# Altium PCB Armadeus.PcbDoc (part 3 of 3)
Units mm, origin at the board's own origin, x right, y up, seen from the top; angles counter-clockwise.
Board outline 152.4 x 101.6 mm, 6 copper layers (Top Layer, MidLayer1, MidLayer2, MidLayer3, MidLayer4, Bottom Layer); 160 components, 306 nets, 1227 pads, 661 vias.
Unrouted connection lines stored in the file: 23.
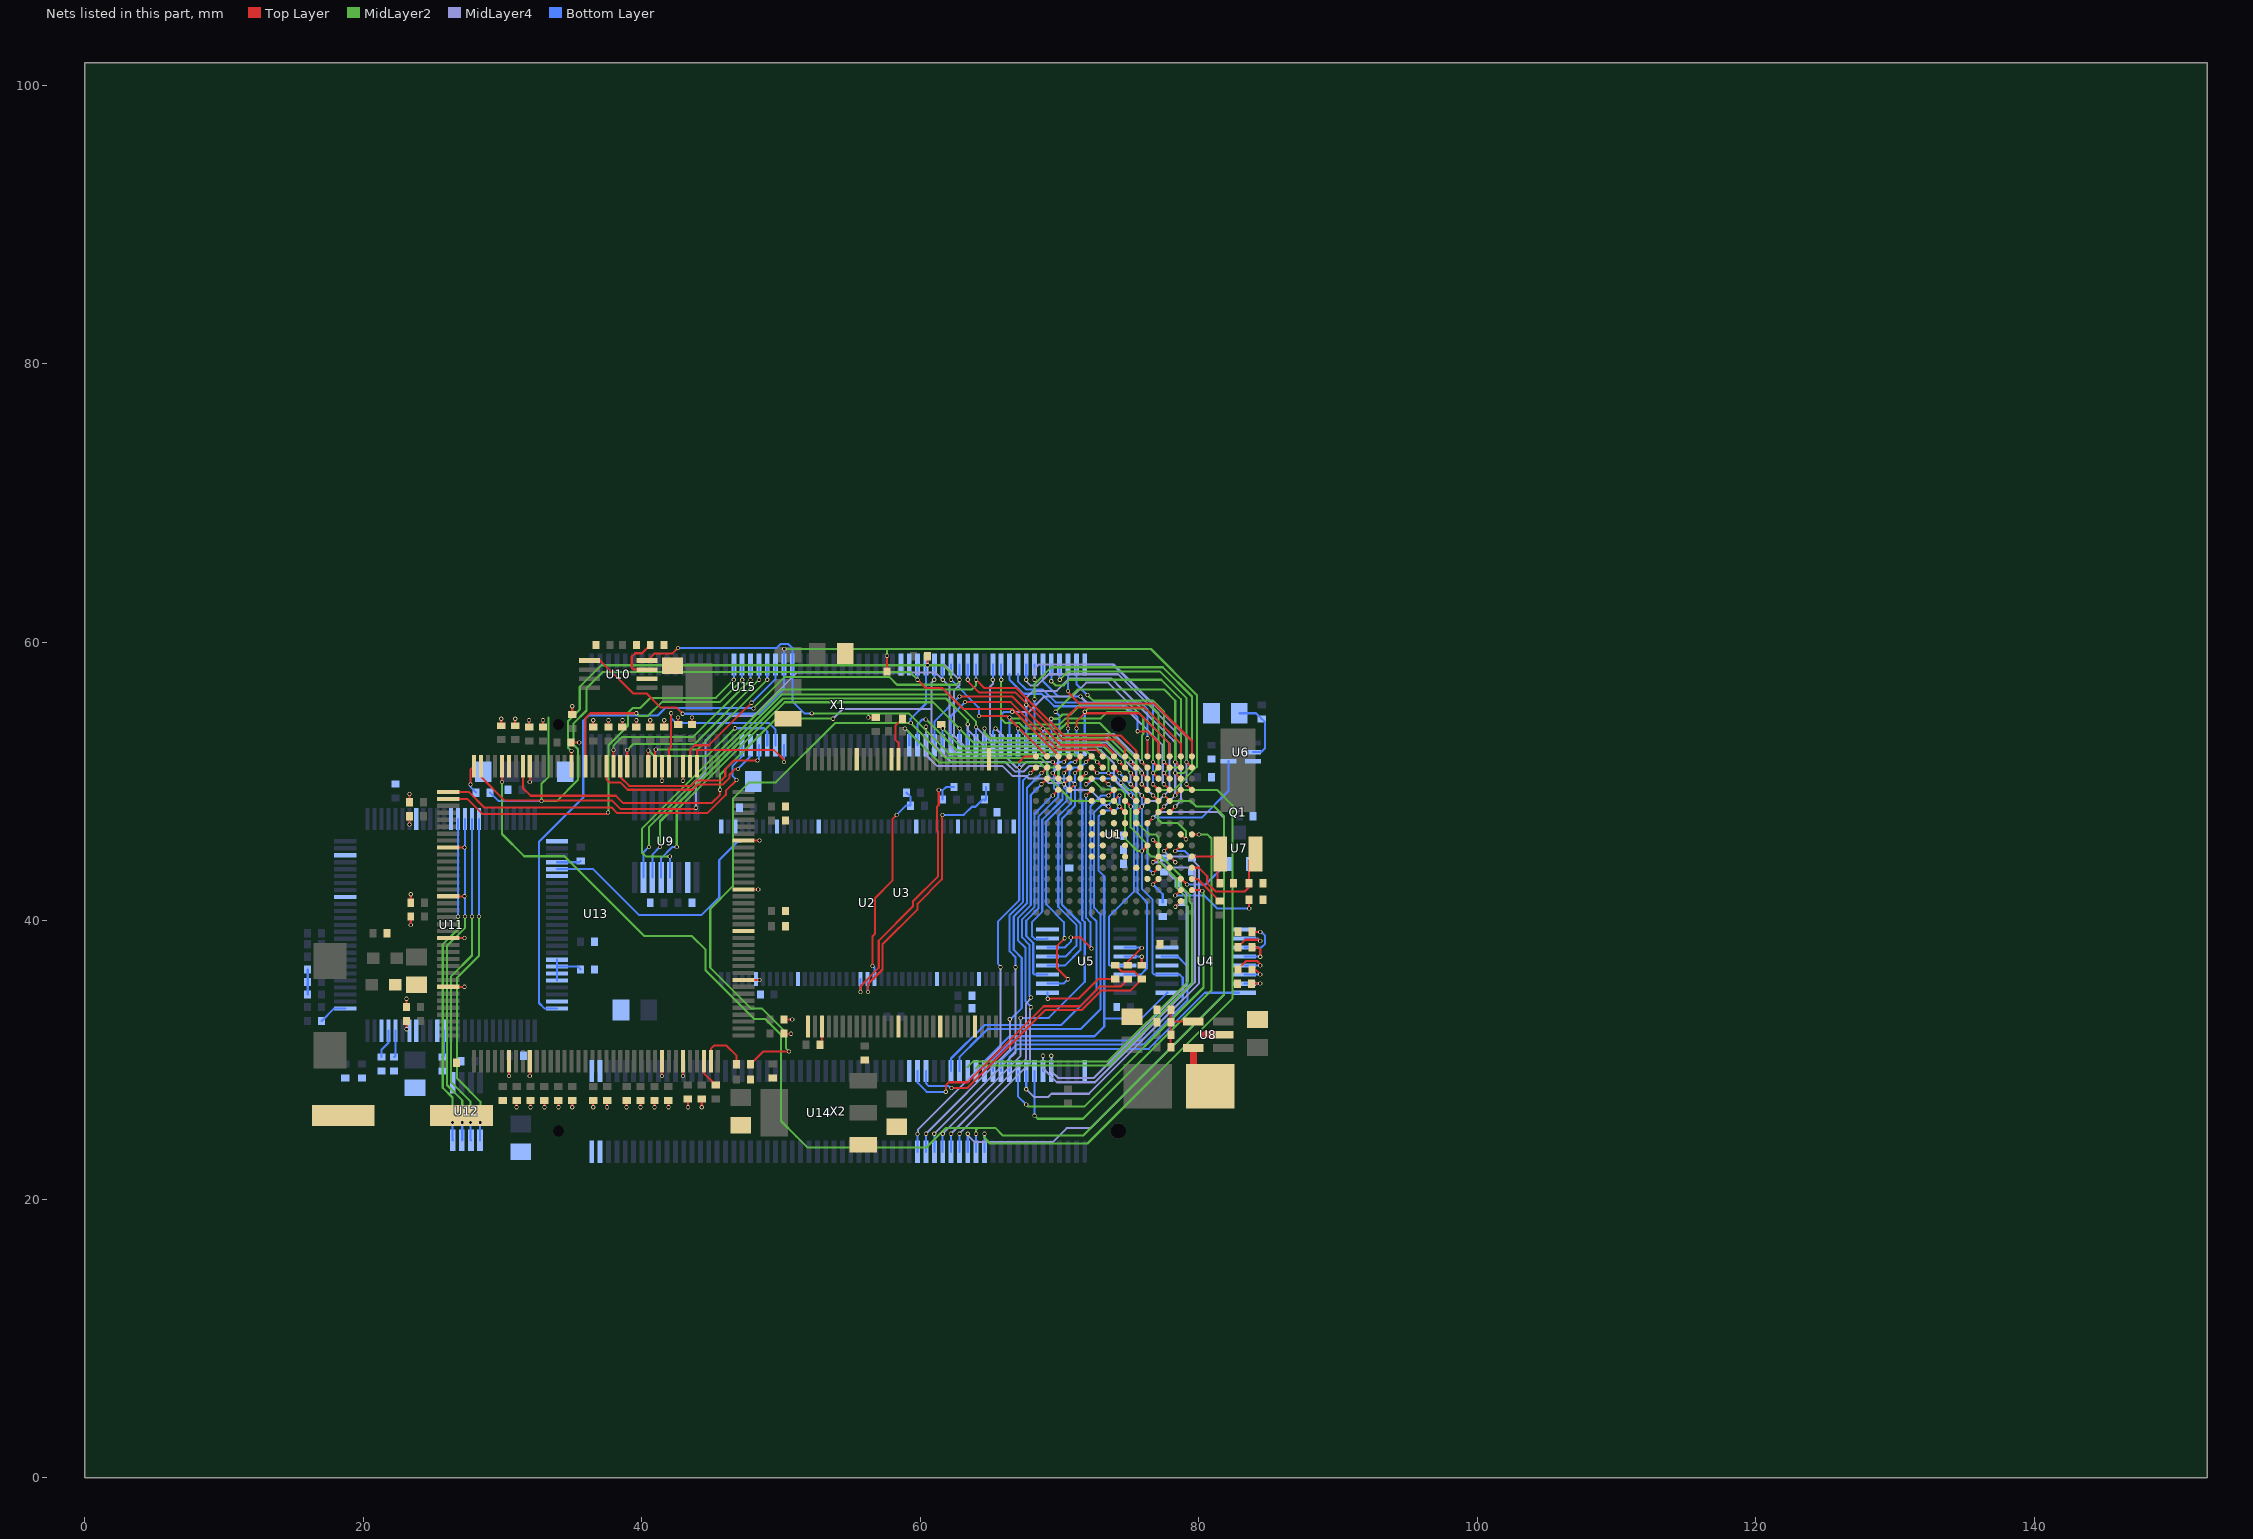
[diagram p7: the nets of this part, all layers, seen from the top]

## Via types
v1: diameter 0.3, hole 0.2, Top Layer to MidLayer2, 182 vias
v2: diameter 0.3, hole 0.2, Top Layer to Bottom Layer, 180 vias
v3: diameter 0.3, hole 0.2, MidLayer2 to Bottom Layer, 120 vias
v4: diameter 0.3, hole 0.2, MidLayer4 to Bottom Layer, 73 vias
v5: diameter 0.3, hole 0.2, Top Layer to MidLayer4, 49 vias
v6: diameter 0.3, hole 0.2, Top Layer to MidLayer3, 34 vias
v7: diameter 0.4, hole 0.2, Top Layer to MidLayer4, 15 vias
v8: diameter 0.3, hole 0.2, Top Layer to MidLayer1, 6 vias
v9: diameter 0.3, hole 0.2, MidLayer2 to MidLayer4, 2 vias

## Nets (pads, with @x,y where several pads share a name; then routed paths per layer and width w, separated by ;. In a path a pad name is that pad's centre, name@x,y a point inside that pad or via, vN(x,y) a via of type N, cw(c..) or ccw(c..) an arc to the next point about the centre after c; other vN are vias at no path point) (continued)
FPGA46: U13.74 X1.78 | length 29.4
  Top Layer w0.15: U13.74@26.1,48.75 27.457,48.75 28.536,47.671 37.461,47.671 v1(37.567,47.777)
  MidLayer2 w0.15: v1(37.567,47.777) 37.6,47.811 37.6,52.6 39,54 39,54.926 39.345,55.27 39.885,55.27 40.615,56 45.3,56 v3(46.6,57.3)
  Bottom Layer w0.15: v3(46.6,57.3) X1.78@46.6,58.4
FPGA47: U13.73 X1.42 | length 25.4
  Top Layer w0.15: U13.73@26.1,49.25 27.559,49.25 28.676,48.133 37.821,48.133 38.227,47.727 44.704,47.727 46.025,49.047 46.025,49.325 v2(46.8,50.1)
  Bottom Layer w0.15: v2(46.8,50.1) 46.5,50.4 46.5,51.1 47.2,51.8 X1.42@47.2,52.6
FPGA48: U13.56 X1.79 | length 17.1
  Top Layer w0.15: U13.56@35.95,51.1 35.95,54.55 36.3,54.9 v1(39.6,54.9)
  MidLayer2 w0.15: v1(39.6,54.9) 39.788,54.712 40.441,54.712 41.429,55.7 45.6,55.7 v3(47.2,57.3)
  Bottom Layer w0.15: v3(47.2,57.3) X1.79@47.2,58.4
FPGA49: U13.53 X1.41 | length 12.7
  Top Layer w0.15: U13.53@37.45,51.1 37.45,50.15 37.689,49.911 38.473,49.911 38.981,49.403 43.645,49.403 44.029,49.787 45.821,49.787 46.3,50.267 46.3,50.5 46.7,50.9 v2(46.9,50.9)
  Bottom Layer w0.15: v2(46.9,50.9) X1.41@47.8,51.8
FPGA50: U13.52 X1.80 | length 14.4
  Top Layer w0.15: U13.52@37.95,51.1 v1(37.95,52.25)
  MidLayer2 w0.15: v1(37.95,52.25) 37.95,52.561 38.589,53.2 39.5,53.2 ; v3(47.8,57.3) 43.7,53.2 39.5,53.2 ; 39.5,53.2 39.492,53.192 39.5,53.2
  Bottom Layer w0.15: v3(47.8,57.3) X1.80@47.8,58.4
FPGA51: U13.51 X1.40 | length 13.1
  Top Layer w0.15: U13.51@38.45,51.1 38.45,50.323 39.091,49.682 43.536,49.682 43.915,50.062 45.679,50.062 45.984,50.368 45.984,50.884 46.6,51.5 v2(48.3,51.5)
  Bottom Layer w0.15: v2(48.3,51.5) 48.4,51.6 X1.40@48.4,52.6
FPGA52: U13.50 X1.81 | length 13.8
  Top Layer w0.15: U13.50@38.95,51.1 v1(38.95,52.25)
  MidLayer2 w0.15: v1(38.95,52.25) 39.387,52.687 43.787,52.687 v3(48.4,57.3)
  Bottom Layer w0.15: v3(48.4,57.3) X1.81@48.4,58.4
FPGA53: U13.47 X1.39 | length 11.7
  Top Layer w0.15: U13.47@40.45,51.1 40.45,52.21 v1(40.462,52.222)
  MidLayer2 w0.15: v1(40.462,52.222) 40.488,52.222 40.869,51.841 44.704,51.841 v3(46.685,53.823)
  Bottom Layer w0.15: v3(46.685,53.823) 48.777,53.823 49,53.6 X1.39@49,52.6
FPGA54: U13.46 X1.82 | length 12.4
  Top Layer w0.15: U13.46@40.95,51.1 40.95,52.25 v1(41,52.3)
  MidLayer2 w0.15: v1(41,52.3) 44,52.3 v3(49,57.3)
  Bottom Layer w0.15: v3(49,57.3) X1.82@49,58.4
FPGA55: U13.44 X1.38 | length 13.2
  Top Layer w0.15: U13.44@41.95,51.1 41.95,52.35 42.1,52.5 v2(42.1,54.9)
  Bottom Layer w0.15: v2(42.1,54.9) 42.1,54.547 42.443,54.204 49.096,54.204 49.6,53.7 X1.38@49.6,52.6
FPGA56: U13.41 X1.83 | length 10.4
  Top Layer w0.15: U13.41@43.45,51.1 43.45,52.25 43.8,52.6 44.8,52.6 47.43,55.23 47.457,55.23 v2(47.879,55.651)
  Bottom Layer w0.15: v2(47.879,55.651) 49.6,57.372 X1.83@49.6,58.4
FPGA57: U13.40 X1.37 | length 9
  Top Layer w0.15: U13.40@43.95,51.1 43.95,52.25 49.5,52.25 50.2,51.55 v2(50.2,51.4)
  Bottom Layer w0.15: v2(50.2,51.4) X1.37@50.2,52.6
GND: C1.1 C2.1 C3.1 C4.1 C5.1 C6.1 C7.1 C8.1 C9.1 C10.1 C11.1 C12.1 C13.1 C14.1 C16.2 C18.2 C19.2 C20.2 C21.1 C22.2 C23.2 C24.1 C26.1 C27.1 C28.1 C29.1 C30.1 C31.1 C32.2 C33.2 C34.2 C35.2 C36.2 C37.2 C40.2 C42.1 C43.1 C44.1 C46.1 C47.1 C48.1 C49.1 C50.1 C51.1 C52.1 C53.1 C54.1 C55.1 C56.1 C57.1 C58.1 C59.1 C60.1 C61.1 C62.1 C63.1 C64.1 C65.1 C66.1 C67.1 C68.1 C69.1 C70.1 C71.1 C72.1 C73.1 C74.1 C75.1 C76.1 C77.1 C78.1 C79.1 C80.1 C81.1 C82.1 C83.1 C84.1 C85.1 C86.1 C87.1 C88.1 C89.1 C90.1 C91.1 C92.1 C93.1 C94.1 C95.1 L3.1 R2.1 R3.1 R4.1 R5.1 R29.1 R42.1 R43.1 R44.1 R45.2 R46.1 U1.E6 U1.G6 U1.G8 U1.G9 U1.G10 U1.H6 U1.H7 U1.H8 U1.H9 U1.J6 U1.J7 U1.J9 U1.K6 U1.K7 U1.K9 U1.L10 U1.L11 U1.L13 U1.M11 U2.6 U2.12 U2.32 U2.38 U2.44 U2.46 U2.52 U2.58 U2.72 U2.78 U2.84 U2.86 U3.2 U3.21 U3.29 U3.42 U3.48 U4.1 U4.12 U4.14 U5.8 U6.3 U7.1 U8.2 U9.10 U10.2 U11.15 U11.18 U11.19 U11.23 U11.42 U11.48 U11.58 U11.63 U11.76 U11.81 U11.99 U12.5 U13.9 U13.16 U13.22 U13.29 U13.42 U13.45 U13.64 U13.67 U13.81 U13.88 U13.94 U13.101 U13.114 U13.117 U13.136 U13.139 U14.1 U15.1 X1.98 X1.99 X2.59 X2.60 X2.61 X2.62 X2.99 | length 35.3
  Top Layer w0.15: v6(23.1,32.2) C81.1@23.1,32.801 ; C51.1@23.1,33.8 v6(23.1,34.4) ; v6(23.3,46.9) C83.1@23.3,47.5 ; C53.1@23.3,48.5 v6(23.3,49.1) ; v6(23.4,39.7) C82.1@23.4,40.301 ; C52.1@23.4,41.3 v6(23.4,41.9) ; U13.101@26.1,35.25 v6(27.25,35.25) ; U13.94@26.1,38.75 v6(27.25,38.75) ; U13.88@26.1,41.75 v6(27.25,41.75) ; U13.81@26.1,45.25 v6(27.25,45.25) ; C84.1@29.9,54 v6(29.9,54.5) ; v2(30.45,28.85) U13.114@30.45,29.9 ; C54.1@30.9,54 v6(30.9,54.5) ; v2(31,26.6) C80.1@31,27.1 ; C90.1@31.901,53.9 v6(31.9,54.4) ; v2(31.95,28.85) U13.117@31.95,29.9 ; v6(31.95,49.95) U13.64@31.95,51.1 ; v2(32,26.6) C59.1@32,27.1 ; C60.1@32.9,53.9 v6(32.9,54.4) ; v2@32.999,26.601 C89.1@32.999,27.1 ; v2(34,26.6) C63.1@34,27.1 ; C94.1@34.9,52.8 v6(35.5,52.8) ; v2@34.999,26.601 C93.1@34.999,27.1 ; C64.1@35,54.8 v6(35,55.4) ; v2(36.5,26.6) 36.501,26.601 C49.1@36.501,27.1 ; C85.1@36.5,53.9 v6(36.5,54.4) ; v2(37.5,26.6) C79.1@37.5,27.1 ; C55.1@37.6,53.9 v6(37.6,54.4) ; C95.1@38.6,53.9 v6(38.6,54.4) ; v2(38.9,26.6) C62.1@38.9,27.1 ; C65.1@39.6,53.9 v6(39.6,54.4) ; v2(39.9,26.6) C92.1@39.9,27.1 ; C91.1@40.6,53.9 v6(40.6,54.4) ; v2(40.9,26.6) C58.1@40.9,27.1 ; v6(41.45,28.85) U13.136@41.45,29.9 ; v6(41.45,50.05) U13.45@41.45,51.1 ; C61.1@41.6,53.9 v6(41.6,54.4) ; v2(41.9,26.6) C88.1@41.9,27.1 ; v6(42.6,54.6) v6(42.6,54.6) C86.1@42.601,54.1 ; v6(42.95,28.85) U13.139@42.95,29.9 ; v6(42.95,50.05) U13.42@42.95,51.1 ; v2(43.3,26.6) C48.1@43.3,27.2 ; C56.1@43.6,54.1 v6(43.6,54.6) ; v2(44.3,26.6) C78.1@44.3,27.2 ; U13.9@47.3,35.75 v6(48.45,35.75) ; U13.22@47.3,42.25 v6(48.35,42.25) ; U13.29@47.3,45.75 v6(48.45,45.75) ; C47.1@50.2,31.9 50.223,31.877 v6(50.698,31.877) ; C77.1@50.2,32.9 v6(50.8,32.9)
  Top Layer w0.5: 80.452,31.811 U8.2@81.745,31.811
  other v2: 33,26.6 35,26.6
I2C0: R6.1 U1.J11 U10.4 X1.85 | length 48.4
  Top Layer w0.15: U10.4@40.375,58.675 40.882,59.182 42.189,59.182 v2(42.596,59.588) ; v1(56.261,54.585) 56.276,54.6 R6.1@56.8,54.6 ; v1(75.895,45.009) 75.909,45.009 U1.J11@76.3,45.4
  MidLayer2 w0.15: v3(52.197,54.889) 59.157,54.889 62.096,51.95 71.138,51.95 71.476,51.613 71.476,50.444 71.704,50.216 72.263,50.216 73.05,49.428 74.398,49.428 74.701,49.125 74.701,45.898 75.59,45.009 v1(75.895,45.009) ; v1(56.261,54.585) 56.261,54.889
  Bottom Layer w0.15: v2(42.596,59.588) 49.682,59.588 49.962,59.868 50.521,59.868 50.8,59.588 50.8,55.753 51.664,54.889 v3(52.197,54.889)
I2C1: R7.1 U1.H14 U10.5 X1.84 | length 65.9
  Top Layer w0.15: U10.5@36.225,58.675 37.007,58.675 39.37,56.312 40.335,56.312 41.351,55.296 42.494,55.296 v2(42.926,54.864) ; R7.1@57.6,57.9 57.6,59.022 v1(57.607,59.03) ; U1.H14@78.7,46.2 79.053,45.847 v1(79.07,45.847)
  MidLayer2 w0.15: v3(50.216,59.512) 76.556,59.512 79.858,56.21 79.858,51.054 78.181,49.378 77.241,49.378 77.064,49.2 77.064,47.269 77.318,47.015 78.486,47.015 79.07,46.431 v1(79.07,45.847) ; v1(57.607,59.03) 57.607,59.487 57.633,59.512
  Bottom Layer w0.15: v2(42.926,54.864) 48.412,54.864 50.2,56.652 X1.84@50.2,58.4 50.216,58.416 v3(50.216,59.512)
JTAG0: U1.K12 X2.116 | length 25.8
  Top Layer w0.15: v5(76.7,44.2) U1.K12@77.1,44.6
  MidLayer4 w0.15: v4(69.4,30.3) 69.4,29.2 69.9,28.7 72.444,28.7 79.096,35.351 79.096,41.961 78.715,42.342 78.715,42.785 78.472,43.028 78.156,43.028 77.902,43.282 77.902,43.598 77.539,43.961 77.3,44.2 v5(76.7,44.2)
  Bottom Layer w0.15: X2.116@69.4,29.2 v4(69.4,30.3)
JTAG1: U1.J12 X2.115 | length 29.1
  Top Layer w0.15: v5(76.7,45.8) U1.J12@77.1,45.4
  MidLayer4 w0.15: v4(68.8,30.3) 68.8,29.4 69.8,28.4 72.533,28.4 79.7,35.567 79.7,43.5 79.385,43.815 78.08,43.815 77.1,44.795 77.1,45.4 v5(76.7,45.8)
  Bottom Layer w0.15: X2.115@68.8,29.2 v4(68.8,30.3)
JTAG2: U1.H15 X2.114 | length 32.2
  Top Layer w0.15: U1.H15@79.5,46.2 v1(80,46.2)
  MidLayer2 w0.15: v3(68.2,26) 68.425,25.775 71.675,25.775 80.9,35 80.9,45.9 80.6,46.2 v1(80,46.2)
  Bottom Layer w0.15: v3(68.2,26) X2.114@68.2,29.2
JTAG3: U1.J13 X2.113 | length 29.3
  Top Layer w0.15: v5(77.5,45) U1.J13@77.9,45.4
  MidLayer4 w0.15: v4(67.6,27.9) 68.17,27.33 69.164,27.33 69.409,27.575 72.097,27.575 80,35.478 80,43.9 79.3,44.6 77.9,44.6 v5(77.5,45)
  Bottom Layer w0.15: v4(67.6,27.9) X2.113@67.6,29.2
JTAG4: U1.N15 X2.112 | length 26.7
  Top Layer w0.15: U1.N15@79.5,42.2 80.177,42.2 v1(80.239,42.139)
  MidLayer2 w0.15: v3(67.6,26.8) 67.73,26.67 71.792,26.67 80.325,35.203 80.325,42.052 v1(80.239,42.139)
  Bottom Layer w0.15: X2.112@67,29.2 67,27.4 v3(67.6,26.8)
LCD0: U1.B12 X1.1 | length 11.5
  Top Layer w0.15: v1(76.7,51.4) U1.B12@77.1,51
  MidLayer2 w0.15: v3(71.8,55) 72.05,55.25 76.15,55.25 76.7,54.7 v1(76.7,51.4)
  Bottom Layer w0.15: X1.1@71.8,52.6 v3(71.8,55)
LCD1: U1.D12 X1.120 | length 12.4
  Top Layer w0.15: v2(76.7,49.8) U1.D12@77.1,49.4
  Bottom Layer w0.15: X1.120@71.8,58.4 73.8,58.4 76.7,55.5 v2(76.7,49.8)
LCD2: U1.A13 X1.2 | length 11.2
  Top Layer w0.15: v2(71.2,53.8) 71.2,54.3 71.8,54.9 75.7,54.9 77.9,52.7 U1.A13@77.9,51.8
  Bottom Layer w0.15: X1.2@71.2,51.9 71.2,53.5 v2(71.2,53.8)
LCD3: U1.B13 X1.119 | length 13
  Top Layer w0.15: v1(77.5,51.4) U1.B13@77.9,51
  MidLayer2 w0.15: v3(72,56.2) 72.4,55.8 76.7,55.8 77.5,55 v1(77.5,51.4)
  Bottom Layer w0.15: X1.119@71.2,58.4 71.2,57 v3(72,56.2) ; 71.5,56.7 71.7,56.5
LCD4: U1.A14 X1.3 | length 12.4
  Top Layer w0.15: v2(70.6,53.8) 70.6,54.7 71.2,55.3 76.1,55.3 78.7,52.7 U1.A14@78.7,51.8
  Bottom Layer w0.15: X1.3@70.6,52.6 70.6,53.3 v2(70.6,53.8)
LCD5: U1.A15 X1.118 | length 12.7
  Top Layer w0.15: v2(70.6,56.5) 70.6,56.4 71.4,55.6 76.8,55.6 79.5,52.9 U1.A15@79.5,51.8
  Bottom Layer w0.15: v2(70.6,56.5) X1.118@70.6,57.7
LCD6: U1.B14 X1.4 | length 17.1
  Top Layer w0.15: v1(78.3,51.4) U1.B14@78.7,51
  MidLayer2 w0.15: v3(69.7,55) 71.3,56.6 77.5,56.6 78.3,55.8 v1(78.3,51.4)
  Bottom Layer w0.15: v3(69.7,55) 70,54.7 X1.4@70,52.6
LCD7: U1.B15 X1.117 | length 16.4
  Top Layer w0.15: v1(79.1,51.4) U1.B15@79.5,51
  MidLayer2 w0.15: v3(70,57.3) 70.6,57.9 77.2,57.9 79.1,56 v1(79.1,51.4)
  Bottom Layer w0.15: v3(70,57.3) X1.117@70,58.4
LCD8: U1.C12 X1.5 | length 15.3
  Top Layer w0.15: v1(76.7,50.6) U1.C12@77.1,50.2
  MidLayer2 w0.15: v3(69.4,54.5) 69.893,54.5 70.2,54.807 70.782,54.807 71.5,55.525 76.475,55.525 77.1,54.9 77.1,51 v1(76.7,50.6)
  Bottom Layer w0.15: X1.5@69.4,52.6 v3(69.4,54.5)
LCD9: U1.C13 X1.116 | length 18.1
  Top Layer w0.15: v1(77.5,50.6) U1.C13@77.9,50.2
  MidLayer2 w0.15: v3(69.4,57.2) 69.7,56.9 70.3,56.9 70.7,57.3 77.3,57.3 78.7,55.9 78.7,51.2 78.5,51 77.9,51 v1(77.5,50.6)
  Bottom Layer w0.15: v3(69.4,57.2) 69.4,57.8 X1.116@69.4,58.4
LCD10: U1.E12 X1.6 | length 12.6
  Top Layer w0.15: v5(76.7,49) U1.E12@77.1,48.6
  MidLayer4 w0.15: v4(68.8,53.8) 69.2,53.4 73.9,53.4 76.3,51 76.3,49.4 v5(76.7,49)
  Bottom Layer w0.15: X1.6@68.8,52.6 v4(68.8,53.8)
LCD11: U1.D13 X1.115 | length 15.1
  Top Layer w0.15: v5(77.5,49.8) U1.D13@77.9,49.4
  MidLayer4 w0.15: v4(71.5,56.1) 72,55.6 74.4,55.6 77.4,52.6 77.4,49.9 v5(77.5,49.8)
  Bottom Layer w0.15: X1.115@68.8,58.4 68.8,57.2 69.9,56.1 v4(71.5,56.1)
LCD12: U1.C14 X1.7 | length 24
  Top Layer w0.15: v1(78.3,50.6) U1.C14@78.7,50.2
  MidLayer2 w0.15: v3(68.2,55.9) 68.2,57 69.4,58.2 77.4,58.2 79.5,56.1 79.5,51.2 78.9,50.6 v1(78.3,50.6)
  Bottom Layer w0.15: X1.7@68.2,52.6 v3(68.2,55.9)
LCD13: U1.D15 X1.114 | length 19
  Top Layer w0.15: v5(79.1,49.8) U1.D15@79.5,49.4
  MidLayer4 w0.15: v4(68.2,57.3) 68.2,58.1 68.5,58.4 73.889,58.4 76.489,55.8 76.5,55.8 79.1,53.2 v5(79.1,49.8)
  Bottom Layer w0.15: v4(68.2,57.3) X1.114@68.2,58.4
LCD14: U1.F12 X1.8 | length 22.1
  Top Layer w0.15: U1.F12@77.1,47.8 v5(77.5,48.2)
  MidLayer4 w0.15: v4(67.6,55.5) 67.6,56 68.1,56.5 69.8,56.5 70.7,57.4 73.7,57.4 74.5,56.6 75.858,55.242 77.9,53.2 78.3,52.8 78.3,49 v5(77.5,48.2)
  Bottom Layer w0.15: X1.8@67.6,52.6 v4(67.6,55.5)
LCD15: U1.F13 X1.113 | length 20.4
  Top Layer w0.15: U1.F13@77.9,47.8 v5(78.3,48.2)
  MidLayer4 w0.15: v4(67.6,57.3) 67.6,57.2 67.9,56.9 68.4,56.9 69.2,57.7 74.2,57.7 78.7,53.2 78.7,48.6 v5(78.3,48.2)
  Bottom Layer w0.15: v4(67.6,57.3) X1.113@67.6,58.4
LCD16: U1.B10 X1.9 | length 11
  Top Layer w0.15: v1(75.1,51.4) U1.B10@75.5,51
  MidLayer2 w0.15: v3(67,53.8) 67.384,53.416 73.284,53.416 75.1,51.6 v1(75.1,51.4)
  Bottom Layer w0.15: X1.9@67,52.6 v3(67,53.8)
LCD17: U1.A11 X1.112 | length 14
  Top Layer w0.15: U1.A11@76.3,51.8 v2(76.3,53.1)
  Bottom Layer w0.15: X1.112@67,57.7 67,57.2 67.6,56.6 68.789,56.6 69.714,55.675 75.825,55.675 75.997,55.503 76.3,55.2 v2(76.3,53.1)
LCD18: U1.B11 X1.10 | length 16.2
  Top Layer w0.15: v1(75.9,51.4) U1.B11@76.3,51
  MidLayer2 w0.15: v3(66.4,54.6) 66.468,54.532 67.2,54.532 67.657,54.075 69.975,54.075 70.432,54.532 72.957,54.532 73.4,54.975 75.625,54.975 76,54.6 76,53.4 75.9,53.3 v1(75.9,51.4)
  Bottom Layer w0.15: X1.10@66.4,52.6 v3(66.4,54.6)
LCD19: U1.A12 X1.111 | length 14.5
  Top Layer w0.15: v2(75.6,53.6) 76.3,53.6 77.1,52.8 U1.A12@77.1,51.8
  Bottom Layer w0.15: X1.111@66.4,57.7 66.4,57.3 67.4,56.3 68.7,56.3 69.6,55.4 74.8,55.4 75,55.2 75.6,54.6 v2(75.6,53.6)
LCD20: U1.F10 X1.11 | length 23.4
  Top Layer w0.15: U1.F10@75.5,47.8 v5(75.9,48.2)
  MidLayer4 w0.15: v4(66.6,55) 67.8,55 68.9,56.1 70.9,56.1 71.9,57.1 73.5,57.1 77.9,52.7 77.9,49.4 77.1,48.6 76.3,48.6 v5(75.9,48.2)
  Bottom Layer w0.15: X1.11@65.8,52.6 65.8,54.8 66,55 v4(66.6,55)
LCD21: U1.C11 X1.110 | length 16.9
  Top Layer w0.15: v1(75.9,50.6) U1.C11@76.3,50.2
  MidLayer2 w0.15: v3(65.8,57.3) 65.8,54.5 66.1,54.2 67.1,54.2 67.5,53.8 70.1,53.8 70.5,54.2 72.889,54.2 75.489,51.6 75.5,51.6 75.5,51 v1(75.9,50.6)
  Bottom Layer w0.15: v3(65.8,57.3) X1.110@65.8,58.4
LCD22: U1.D11 X1.12 | length 14.6
  Top Layer w0.15: v5(75.9,49.8) U1.D11@76.3,49.4
  MidLayer4 w0.15: v4(65.4,53.8) 66.1,53.1 73.6,53.1 75.9,50.8 v5(75.9,49.8)
  Bottom Layer w0.15: X1.12@65.2,52.6 65.2,53.6 v4(65.4,53.8)
LCD23: U1.E11 X1.109 | length 19.1
  Top Layer w0.15: v5(75.9,49) U1.E11@76.3,48.6
  MidLayer4 w0.15: v4(65.2,57.3) 65.2,57 65,56.8 65,53.4 65.6,52.8 73.4,52.8 75.5,50.7 75.5,49.4 v5(75.9,49)
  Bottom Layer w0.15: v4(65.2,57.3) X1.109@65.2,58.4
LCD24: U1.C10 X1.13 | length 14.1
  Top Layer w0.15: v1(75.1,50.6) U1.C10@75.5,50.2
  MidLayer2 w0.15: v3(64.6,53.8) 64.6,53.5 65,53.1 73.2,53.1 74.7,51.6 74.7,51 v1(75.1,50.6)
  Bottom Layer w0.15: X1.13@64.6,52.6 v3(64.6,53.8)
NetC7_2: C7.2 Q1.1 U1.K15 | length 4.1
  Top Layer w0.15: U1.K15@79.5,44.6 Q1.1@81.33,44.6 ; C7.2@81.5,42.7 81.33,42.87 Q1.1@81.33,44.6 ; Q1.1@81.53,44.8 Q1.1@81.33,44.6
NetC8_2: C8.2 Q1.2 U1.L15 | length 7.8
  Top Layer w0.15: U1.L15@79.5,43.8 80,43.8 80.6,43.2 80.6,42.7 81.2,42.1 83.299,42.1 83.6,42.401 83.6,42.8 83.6,44.33 Q1.2@84.07,44.8
NetC15_1: C15.1 U4.4 | length 2.3
  Top Layer w0.15: C15.1@83.775,38.075 84.251,38.075 84.404,37.922 v2(84.404,37.414)
  Bottom Layer w0.15: U4.4@83.275,37.425 84.393,37.425 v2(84.404,37.414)
NetC15_2: C15.2 U4.2 | length 3.1
  Top Layer w0.15: C15.2@82.775,38.075 83.333,38.633 84.303,38.633 v2(84.404,38.532)
  Bottom Layer w0.15: U4.2@83.275,38.725 84.211,38.725 v2(84.404,38.532)
NetC16_1: C16.1 U4.3 | length 3.2
  Top Layer w0.15: C16.1@83.8,39.2 84.396,39.2 v2(84.404,39.192)
  Bottom Layer w0.15: U4.3@83.275,38.075 84.481,38.075 84.76,38.354 84.76,38.913 84.48,39.192 v2(84.404,39.192)
NetC17_1: C17.1 U4.6 | length 1.9
  Top Layer w0.15: C17.1@83.8,36.5 84.048,36.5 v2(84.404,36.144)
  Bottom Layer w0.15: U4.6@83.275,36.125 84.385,36.125 v2(84.404,36.144)
NetC17_2: C17.2 U4.5 | length 3.2
  Top Layer w0.15: C17.2@82.8,36.5 83.409,37.109 84.176,37.109 84.404,36.881 v2(84.404,36.779)
  Bottom Layer w0.15: U4.5@83.275,36.775 84.4,36.775 v2(84.404,36.779)
NetC18_1: C18.1 U4.7 | length 1.7
  Top Layer w0.15: C18.1@83.8,35.5 83.816,35.484 v2(84.404,35.484)
  Bottom Layer w0.15: U4.7@83.275,35.475 84.395,35.475 v2(84.404,35.484)
NetC21_2: C21.2 R27.1 U6.2 | length 5
  Bottom Layer w0.15: C21.2@82.9,54.9 84.1,54.9 R27.1@84.5,54.5 84.76,54.24 84.76,52.4 84.459,52.1 U6.2@83.875,52.1
NetC25_1: C25.1 C27.2 R28.1 R29.2 U8.4 | length 4.4
  Top Layer w0.15: C27.2@77.97,33.611 77.97,32.691 R29.2@77.973,32.688 ; R28.1@77.973,30.888 77.973,31.808 77.97,31.811 77.97,32.685 78.046,32.761 U8.4@79.595,32.761
NetC41_2: C41.2 R34.1 R35.1 | length 1.8
  Bottom Layer w0.15: R35.1@16,34.7 C41.2@16,35.6 R34.1@16,36.5
NetC43_2: C43.2 Q2.1 U11.21 | length 1.9
  Bottom Layer w0.15: C43.2@22.2,30.2 22.3,30.3 U11.21@22.3,32.1
NetC44_2: C44.2 Q2.2 U11.22 | length 2.1
  Bottom Layer w0.15: C44.2@21.3,30.2 21.3,30.723 21.8,31.223 U11.22@21.8,32.1
NetL1_1: L1.1 U8.5 | length 3.3
  Top Layer w0.15: L1.1@79.595,29.336 L1.1@80.82,28.111 L1.1@80.82,28.161
  Top Layer w0.5: L1.1@79.595,29.336 U8.5@79.595,30.861
NetR2_2: R2.2 U1.K13 | length 1.5
  Top Layer w0.15: U1.K13@77.9,44.6 v2(78.3,44.2)
  Bottom Layer w0.15: R2.2@77.5,44.5 78,44.5 v2(78.3,44.2)
NetR3_2: R3.2 U1.J14 | length 2
  Top Layer w0.15: v2(78.3,45) U1.J14@78.7,45.4
  Bottom Layer w0.15: v2(78.3,45) 79,45 R3.2@79.5,44.5
NetR4_2: R4.2 U1.M12 | length 2.2
  Top Layer w0.15: v2(76.7,42.6) 76.871,42.771 U1.M12@77.1,43
  Bottom Layer w0.15: v2(76.7,42.6) 77.4,41.9 R4.2@77.4,41.3
NetR5_2: R5.2 U1.N14 | length 6.8
  Top Layer w0.15: v2(78.3,41.8) U1.N14@78.7,42.2 ; R5.2@83.6,41.4 83.6,40.886 v2(83.617,40.869)
  Bottom Layer w0.15: v2(78.3,41.8) 80.401,41.8 81.332,40.869 v2(83.617,40.869)
NetR8_1: R8.1 U1.P14 | length 1.2
  Top Layer w0.15: v2@78.3,41 78.302,41.002 U1.P14@78.7,41.4
  Bottom Layer w0.15: v2(78.308,40.996) 78.613,41.3 R8.1@78.8,41.3
NetR9_1: R9.1 U1.M15 | length 2.7
  Top Layer w0.15: U1.M15@79.5,43 79.9,43 R9.1@81.5,41.4
NetR10_2: R10.2 U3.31 | length 1.4
  Top Layer w0.15: R10.2@52.8,31.1 52.925,31.225 U3.31@52.925,32.4
NetR11_2: R11.2 R12.2 U2.23 | length 19.7
  Top Layer w0.15: v2(55.702,34.874) 55.702,35.306 57.006,36.61 57.006,38.566 59.461,41.021 59.461,41.377 61.269,43.184 61.269,46.376 61.2,46.445 61.2,48.205 61.316,48.32 v2(61.316,49.378) v2@61.269,49.331
  Bottom Layer w0.15: U2.23@55.7,35.8 55.7,34.876 v2(55.702,34.874) ; v2(61.316,49.378) 61.579,49.378 61.6,49.357 ; R12.2@61.6,48.7 61.6,49.357 ; R11.2@62.4,49.6 61.843,49.6 61.6,49.357
NetR13_2: R13.2 R14.2 U2.22 | length 20.3
  Top Layer w0.15: v2(56.236,34.874) 56.236,35.45 57.281,36.496 57.281,38.307 59.796,40.822 59.796,41.229 61.544,42.977 61.544,47.549 v2(61.595,47.6)
  Bottom Layer w0.15: U2.22@56.2,35.8 56.2,34.91 v2(56.236,34.874) ; v2(61.595,47.6) 63.119,47.6 63.703,48.184 63.957,48.184 64.473,48.7 R13.2@64.6,48.7 ; R13.2@64.65,48.65 64.7,48.7 R14.2@64.7,49.6
NetR15_2: R15.2 R16.2 U2.21 | length 15
  Top Layer w0.15: v2@56.566,36.678 56.566,38.887 56.735,39.056 56.735,41.622 57.988,42.875 57.988,47.295 v2(58.293,47.6)
  Bottom Layer w0.15: v2(56.566,36.754) 56.7,36.62 U2.21@56.7,35.8 ; v2(58.293,47.6) 58.953,48.26 R15.2@59.3,48.26 59.3,48.9 R16.2@59,49.2
NetR17_1: R17.1 U3.15 | length 3.2
  Top Layer w0.15: U3.15@58.425,51.6 58.425,52.775 58.2,53 58.2,54 R17.1@58.7,54.5
NetR19_1: R19.1 U3.53 | length 0
  Top Layer w0.15: U3.53@63.9,32.375 U3.53@63.925,32.4
NetR21_2: R21.2 U5.1 | length 5.9
  Top Layer w0.15: v2(69.139,34.392) 69.147,34.4 71.357,34.4 72.757,35.8 R21.2@74,35.8
  Bottom Layer w0.15: U5.1@69.125,34.825 69.125,34.405 v2(69.139,34.392)
NetR22_1: R22.1 U5.12 | length 1.8
  Top Layer w0.15: v2(75.895,37.414) 75.895,36.805 R22.1@75.9,36.8
  Bottom Layer w0.15: U5.12@74.675,37.425 75.884,37.425 v2(75.895,37.414)
NetR23_1: R23.1 U5.11 | length 2.9
  Top Layer w0.15: R23.1@74.9,36.8 74.9,37.054 v2(75.895,38.049)
  Bottom Layer w0.15: U5.11@74.675,38.075 75.869,38.075 v2(75.895,38.049)
NetR30_1: R30.1 U11.79 | length 1.7
  Bottom Layer w0.15: U11.79@33.9,44.2 35.5,44.2 R30.1@35.6,44.3
NetR31_1: R31.1 U11.67 U12.1 | length 24.4
  MidLayer2 w0.15: v3(28.296,40.31) 28.296,37.465 26.721,35.89 26.721,28.677 28.397,27 v3(28.397,25.502)
  Bottom Layer w0.15: v3(28.296,40.31) 28.3,40.314 U11.67@28.3,47.3 ; U12.1@28.375,24.225 28.375,25.479 v3(28.397,25.502)
NetR36_2: R36.2 U11.26 | length 2.1
  Bottom Layer w0.15: R36.2@17,32.8 17.9,33.7 U11.26@18.7,33.7
NetR38_2: R38.2 U13.142 | length 2.1
  Top Layer w0.15: U13.142@44.45,29.9 44.45,29.05 R38.2@45.3,28.2
NetR40_2: R40.2 U13.72 | length 2.3
  Top Layer w0.15: v2(27.686,49.784) 27.686,50.836 U13.72@28,51.15
  Bottom Layer w0.15: v2(27.686,49.784) 27.686,49.614 R40.2@28.1,49.2
NetR41_2: R41.2 U13.143 | length 3.7
  Top Layer w0.15: U13.143@44.95,29.9 44.95,30.802 45.187,31.039 46.05,31.039 46.8,30.289 R41.2@46.8,29.7
NetR44_2: R44.2 U10.3 | length 3.6
  Top Layer w0.15: U10.3@40.375,58.025 39.435,58.025 39.268,58.191 39.268,58.953 39.522,59.207 40.007,59.207 R44.2@40.6,59.8
NetR45_1: R45.1 U11.93 U11.94 U11.95 U11.96 | length 3.3
  Bottom Layer w0.15: U11.96@33.9,35.7 U11.93@33.9,37.2 ; U11.94@33.9,36.7 35.4,36.7 R45.1@35.6,36.5
NetR46_2: R46.2 U11.14 | length 1.9
  Bottom Layer w0.15: R46.2@25.7,30.2 25.8,30.3 U11.14@25.8,32.1
NetU11_64: U11.64 U12.4 | length 23.8
  MidLayer2 w0.15: v3(26.4,25.5) 26.4,27.3 25.7,28 25.7,38.3 26.8,39.4 v3(26.8,40.3)
  Bottom Layer w0.15: v3(26.4,25.5) 26.4,24.25 U12.4@26.425,24.225 ; v3(26.8,40.3) U11.64@26.8,47.3
NetU11_65: U11.65 U12.3 | length 24.1
  MidLayer2 w0.15: v3(27.1,25.5) 27.1,27.1 26,28.2 26,38.2 27.3,39.5 v3(27.3,40.3)
  Bottom Layer w0.15: U12.3@27.075,24.225 27.1,24.25 v3(27.1,25.5) ; v3(27.3,40.3) U11.65@27.3,47.3
NetU11_66: U11.66 U12.2 | length 24.3
  MidLayer2 w0.15: v3(27.7,25.5) 27.7,27 26.3,28.4 26.3,36 27.8,37.5 v3(27.8,40.3)
  Bottom Layer w0.15: v3(27.7,25.5) 27.7,24.25 U12.2@27.725,24.225 ; v3(27.8,40.3) U11.66@27.8,47.3
POR: U1.L12 U6.4 | length 13.2
  Top Layer w0.15: v2(76.7,43.4) U1.L12@77.1,43.8
  Bottom Layer w0.15: v2(76.7,43.4) 76.3,43.8 76.3,47 76.7,47.4 80.2,47.4 82.125,49.325 U6.4@82.125,51.45
RESETN: U1.M14 U3.16 U7.2 U11.80 X2.120 | length 22.4
  Top Layer w0.15: U1.M14@78.7,43 78.742,43 v2(79.146,42.596)
  Bottom Layer w0.15: U11.80@33.9,43.7 36.5,43.7 39.8,40.4 44.272,40.4 45.554,41.682 45.554,44.354 46.9,45.7 47.1,45.7 ; v2(79.146,42.596) 80.471,42.596 U7.2@81.95,44.075
SD0: U1.C2 X2.16 | length 30.2
  Top Layer w0.15: v2(68.7,49.8) U1.C2@69.1,50.2
  MidLayer4 w0.15: v4(62.8,24.7) 67.864,29.764 67.864,33.701 v4(67.945,33.782)
  Bottom Layer w0.15: X2.16@62.8,23.4 v4(62.8,24.7) ; v4(67.945,33.782) 67.945,33.833 67.55,34.228 67.55,38.05 67,38.6 67,40.189 67.925,41.114 67.925,49.025 v2(68.7,49.8)
SD1: U1.D3 X2.17 | length 29.7
  Top Layer w0.15: v2(69.5,49) U1.D3@69.9,49.4
  MidLayer4 w0.15: v4(62.2,24.7) 67.289,29.789 ; 67.285,29.794 67.589,30.099 67.589,34.061 67.945,34.417 v4(67.945,34.493)
  Bottom Layer w0.15: X2.17@62.2,23.4 v4(62.2,24.7) ; v4(67.945,34.493) 67.825,34.613 67.825,38.275 67.3,38.8 67.3,40.1 68.2,41 68.2,47.7 v2(69.5,49)
SD2: U1.C5 X2.18 | length 33.5
  Top Layer w0.15: U1.C5@71.5,50.2 v2(71.9,50.6)
  MidLayer4 w0.15: v4(61.6,24.7) 67.2,30.3 67.2,33.012 v4(67.208,33.02)
  Bottom Layer w0.15: X2.18@61.6,23.4 v4(61.6,24.7) ; v4(67.208,33.02) 69.209,33.02 ; 69.215,33.02 71.806,35.611 ; 71.8,35.611 71.8,39.889 71.625,40.064 71.625,48.535 71.5,48.66 71.5,50.2 v2(71.9,50.6)
SD3: U1.B1 X2.19 | length 31
  Top Layer w0.15: v2(67.9,50.6) U1.B1@68.3,51
  MidLayer4 w0.15: v4(61,24.7) 66.285,29.985 66.827,30.527 v4(66.827,36.652)
  Bottom Layer w0.15: X2.19@61,23.4 v4(61,24.7) ; v4(66.827,36.652) 66.827,37.384 66.411,37.8 66.4,37.8 66.4,40.389 67.375,41.364 67.375,50.075 v2(67.9,50.6)
SD4: U1.B2 X2.20 | length 31.7
  Top Layer w0.15: v2(68.7,50.6) U1.B2@69.1,51
  MidLayer4 w0.15: v4(60.4,24.7) 66.421,30.721 v4(66.421,32.918)
  Bottom Layer w0.15: X2.20@60.4,23.4 v4(60.4,24.7) ; v4(66.421,32.918) 66.472,32.918 67.275,33.722 67.275,37.325 66.7,37.9 66.7,40.3 67.65,41.25 67.65,49.55 v2(68.7,50.6)
SD5: U1.A1 X2.21 | length 32.6
  Top Layer w0.15: 67.1,51.4 67.5,51.8 U1.A1@68.3,51.8 U1.A1@68.3,51.9
  MidLayer4 w0.15: v4(59.792,24.689) 59.817,24.714 59.817,24.994 65.761,30.937 v4(65.761,36.652)
  Bottom Layer w0.15: v4(59.792,24.689) 59.792,23.408 X2.21@59.8,23.4 ; v4(65.761,36.652) 65.557,36.932 65.557,39.935 67.1,41.478 67.1,51.4
  other v2: 67.107,51.003
SPI0: U1.D10 U9.15 X1.14 | length 47.6
  Top Layer w0.15: v5(75.1,49.8) U1.D10@75.5,49.4
  MidLayer2 w0.15: v3(40.5,45.3) 40.5,46.715 50.021,56.236 62.064,56.236 64,54.3 v3(64,53.9)
  MidLayer4 w0.15: v3(64,53.9) 65.375,52.525 73.175,52.525 75.1,50.6 v5(75.1,49.8)
  Bottom Layer w0.15: U9.15@40.113,43.1 40.113,44.913 v3(40.5,45.3) ; X1.14@64,52.6 v3(64,53.9)
SPI1: U1.E10 U9.14 X1.15 | length 47.7
  Top Layer w0.15: v5(75.1,49) U1.E10@75.5,48.6
  MidLayer2 w0.15: v3(41.3,45.3) 41.3,47.126 50.134,55.961 61.839,55.961 63.216,54.584 63.4,54.4 v3(63.4,54.1)
  MidLayer4 w0.15: v3(63.4,54.1) 63.4,53.7 64.85,52.25 72.95,52.25 73.9,51.3 73.9,50.2 v5(75.1,49)
  Bottom Layer w0.15: U9.14@40.748,43.1 40.748,44.748 v3(41.3,45.3) ; X1.15@63.4,52.6 v3(63.4,54.1)
SPI2: U1.B9 U9.13 X1.16 | length 44
  Top Layer w0.15: v1(74.3,51.4) U1.B9@74.7,51
  MidLayer2 w0.15: v3(42.5,45.3) 42.5,47.937 50.248,55.686 60.914,55.686 63.8,52.8 72.9,52.8 v1(74.3,51.4)
  Bottom Layer w0.15: U9.13@41.383,43.1 41.383,44.483 42.2,45.3 v3(42.5,45.3) ; X1.16@62.8,52.6 v3(62.8,53.8)
SPI3: U1.A10 U9.12 X1.107 | length 49.1
  Top Layer w0.15: v2(64,57.3) 64.6,56.7 66.9,56.7 70.3,53.3 74.4,53.3 75.5,52.2 U1.A10@75.5,51.8
  MidLayer2 w0.15: v3(42,44.6) 40.3,44.6 40,44.9 40,46.604 49.996,56.6 63.7,56.6 64,56.9 v2(64,57.3)
  Bottom Layer w0.15: U9.12@42.018,43.1 v3@42.018,44.582 ; v2(64,57.3) X1.107@64,58.4
SPI4: U1.A9 X1.106 | length 15
  Top Layer w0.15: v2(63.4,57.3) 63.4,57.2 64.2,56.4 66.8,56.4 70.175,53.025 73.975,53.025 74.7,52.3 U1.A9@74.7,51.8
  Bottom Layer w0.15: v2(63.4,57.3) X1.106@63.4,58.4
SSI_A0: U1.A7 X1.17 | length 15
  Top Layer w0.15: v2(63.2,55.7) 66.489,55.7 69.889,52.3 72.6,52.3 U1.A7@73.1,51.8
  Bottom Layer w0.15: X1.17@62.2,52.6 62.2,54.7 v2(63.2,55.7)
SSI_A1: U1.C8 X1.18 | length 15.6
  Top Layer w0.15: v1(73.5,50.6) U1.C8@73.9,50.2
  MidLayer2 w0.15: v3(61.6,53.8) 62.9,52.5 72.6,52.5 73.5,51.6 v1(73.5,50.6)
  Bottom Layer w0.15: X1.18@61.6,52.6 v3(61.6,53.8)
SSI_A2: U1.A8 X1.19 | length 17.2
  Top Layer w0.15: v2(62.8,56.1) 66.6,56.1 70.1,52.6 73.3,52.6 73.9,52 U1.A8@73.9,51.8
  Bottom Layer w0.15: X1.19@61,52.6 61,54.3 v2(62.8,56.1)
SSI_A3: U1.F8 X1.20 | length 18.5
  Top Layer w0.15: v5(73.5,48.2) U1.F8@73.9,47.8
  MidLayer4 w0.15: v4(60.401,53.924) 60.401,51.899 61.2,51.1 65.9,51.1 66.6,50.4 67.6,50.4 67.8,50.2 68.9,50.2 69.2,49.9 70.2,49.9 70.7,49.4 72.2,49.4 73.4,48.2 v5(73.5,48.2)
  Bottom Layer w0.15: X1.20@60.4,52.6 v4(60.401,53.924) v4(60.401,53.924)
SSI_A4: U1.B7 X1.21 | length 16.4
  Top Layer w0.15: v1(72.7,51.4) U1.B7@73.1,51
  MidLayer2 w0.15: v3(60.376,54.458) 60.401,54.458 62.634,52.225 71.875,52.225 v1(72.7,51.4)
  Bottom Layer w0.15: X1.21@59.8,52.6 59.8,54.11 60.147,54.458 v3(60.376,54.458)
SSI_A5: U1.F9 X1.22 | length 19.9
  Top Layer w0.15: v1(74.3,48.2) U1.F9@74.7,47.8
  MidLayer2 w0.15: v3(58.9,53.8) 61.341,51.359 68.555,51.359 69.139,50.775 69.139,50.343 70.882,48.6 73.9,48.6 v1(74.3,48.2)
  Bottom Layer w0.15: v3(58.9,53.8) 59.2,53.5 X1.22@59.2,52.6
SSI_B0: U1.C3 U11.100 X1.105 | length 68.6
  Top Layer w0.15: v5(69.5,50.6) U1.C3@69.9,50.2
  MidLayer2 w0.15: v3(48.006,55.245) 50.267,57.506 57.76,57.506 58.318,56.947 62.577,56.947 62.8,57.17 v2(62.8,57.3)
  MidLayer4 w0.15: 61.7,58.4 v2(62.8,57.3) 62.8,56.9 62.4,56.5 62.4,53.3 63.725,51.975 69.525,51.975 69.9,51.6 69.9,51 v5(69.5,50.6)
  Bottom Layer w0.15: U11.100@33.9,33.7 33,33.7 32.614,34.086 32.614,45.669 35.789,48.844 35.789,54.356 36.17,54.737 41.148,54.737 41.681,55.27 47.981,55.27 v3(48.006,55.245) ; v2(62.8,57.3) 62.8,57.7 X1.105@62.8,58.4
SSI_B1: R37.1 U1.A2 U13.58 X1.104 | length 45.4
  Top Layer w0.15: U13.58@34.95,51.1 v1(34.95,52.197) ; R37.1@60.5,59 60.5,58.347 v1(60.503,58.344) ; v2(64.2,54.7) 66.2,54.7 U1.A2@69.1,51.8
  MidLayer2 w0.15: v1@34.925,52.197 34.696,52.426 34.696,54.331 35.535,55.169 35.535,56.794 37.084,58.344 61.646,58.344 62.205,57.785 v3(62.205,57.302)
  Bottom Layer w0.15: X1.104@62.2,58.4 62.2,57.307 v3(62.205,57.302) ; v3@62.201,57.299 64.2,55.3 v2(64.2,54.7)
SSI_B2: R39.1 U1.B3 U13.71 X1.103 | length 55.9
  Top Layer w0.15: U13.71@28.45,50.315 30.126,48.64 37.847,48.64 38.456,48.031 43.815,48.031 v5(43.891,48.108) ; v5(69.5,51.4) U1.B3@69.9,51
  MidLayer4 w0.15: v5(43.891,48.108) 43.891,49.936 44.577,50.622 44.577,52.959 46.33,54.712 48.031,54.712 51.156,57.836 61.064,57.836 62.1,56.8 62.1,52.5 62.625,51.975 ; 62.488,52.112 62.9,51.7 66.2,51.7 66.9,51 67.2,51 67.6,51.4 v5(69.5,51.4)
  Bottom Layer w0.15: X1.103@61.595,58.405 X1.103@61.6,58.4 v4(61.6,57.3)
SSI_B3: U1.D4 U13.65 X1.102 | length 53.3
  Top Layer w0.15: U13.65@31.45,51.1 31.45,49.525 32.004,48.971 38.125,48.971 38.633,48.463 45.034,48.463 45.618,49.047 v1(45.618,49.403) ; U1.D4@70.7,49.4 v5(71.1,49.8)
  MidLayer2 w0.15: v1(45.618,49.403) 45.618,50.495 49.632,54.508 v9(53.721,54.508)
  MidLayer4 w0.15: v9(53.721,54.508) 54.407,55.194 60.8,55.194 ; v4(61,57.3) 60.8,57.1 60.8,52.8 62.2,51.4 66.1,51.4 66.8,50.7 67.4,50.7 67.8,51.1 68.8,51.1 69.1,50.8 69.1,50.5 69.4,50.2 70.7,50.2 v5(71.1,49.8)
  Bottom Layer w0.15: v4(61,57.3) X1.102@61,58.4
SSI_B4: R41.1 U1.C4 X1.101 | length 58.2
  Top Layer w0.15: R41.1@47.8,29.7 48.707,30.607 v1(50.571,30.607) ; v1(70.3,49.8) U1.C4@70.7,50.2
  MidLayer2 w0.15: v1(50.571,30.607) 50.343,30.836 50.343,31.979 48.616,33.706 47.828,33.706 44.907,36.627 44.907,40.843 46.533,42.469 46.533,48.768 47.697,49.932 49.619,49.932 53.887,54.2 v3(59.3,54.2) 61.825,51.675 68.67,51.675 69.342,51.003 69.774,51.003 69.901,50.876 69.901,50.199 v1(70.3,49.8)
  Bottom Layer w0.15: v3(59.3,54.2) 59.3,54.5 60.4,55.6 X1.101@60.4,58.4
SSI_B5: R40.1 U1.A3 X1.100 | length 58.5
  Top Layer w0.15: v2(59.8,57.3) 60.4,56.7 61.589,56.7 63.089,55.2 66.6,55.2 69.9,51.9 U1.A3@69.9,51.8
  MidLayer2 w0.15: 33.299,54.585 33.299,50.343 32.791,49.835 v3(32.791,48.59) 33.884,48.59 35.408,50.114 35.408,52.324 35.077,52.654 35.077,54.153 36.017,55.093 36.017,56.693 37.186,57.861 59.239,57.861 v2(59.8,57.3)
  Bottom Layer w0.15: R40.1@29.1,49.2 29.71,48.59 v3(32.791,48.59) ; v2(59.8,57.3) 59.8,57.9 X1.100@59.8,58.4
TIM0: U1.D14 X2.13 | length 43.1
  Top Layer w0.15: v1(78.3,49) U1.D14@78.7,49.4
  MidLayer2 w0.15: v3(64.6,24.7) 64.6,24.4 65,24 72,24 82.4,34.4 82.4,48.3 81.3,49.4 78.7,49.4 v1(78.3,49)
  Bottom Layer w0.15: X2.13@64.6,23.4 v3(64.6,24.7)
TIM1: U1.E13 U13.68 X2.14 | length 95.6
  Top Layer w0.15: v1(29.95,49.95) U13.68@29.95,51.1 ; v1(77.5,49) U1.E13@77.9,48.6
  MidLayer2 w0.15: v1(29.95,49.95) 29.95,46.225 31.547,44.628 34.442,44.628 40.17,38.9 43.586,38.9 44.577,37.909 44.577,36.424 48.061,32.939 48.849,32.939 49.987,31.801 49.987,25.613 51.079,24.521 51.9,23.7 60.4,23.7 61.8,25.1 65.4,25.1 65.925,24.575 71.686,24.575 81.8,34.689 81.8,47.5 81.1,48.2 79.8,48.2 79.4,48.6 77.9,48.6 v1(77.5,49) ; v3(64,24.7) 64,25 64.1,25.1
  Bottom Layer w0.15: X2.14@64,23.4 v3(64,24.7)
TIM2: U1.G11 X2.15 | length 43.1
  Top Layer w0.15: U1.G11@76.3,47 v5(76.7,47.4)
  MidLayer4 w0.15: v4(63.4,24.7) 63.4,24.6 63.9,24.1 69.5,24.1 70.5,25.1 72.211,25.1 81.8,34.689 81.8,47.4 81.4,47.8 77.1,47.8 v5(76.7,47.4)
  Bottom Layer w0.15: X2.15@63.4,23.4 v4(63.4,24.7)
UART0: U1.E8 U4.9 X2.108 | length 34.1
  Top Layer w0.15: U1.E8@73.9,48.6 v2(74.3,49)
  Bottom Layer w0.15: X2.108@64.6,29.2 64.6,29.9 66.4,31.7 72.5,31.7 73.2,32.4 73.2,43.2 72.8,43.6 72.8,47.5 73.2,47.9 74,47.9 74.3,48.2 v2(74.3,49) ; 73.2,32.969 75.869,32.969 U4.9@77.725,34.825
UART1: U1.B8 U4.11 X2.109 | length 36
  Top Layer w0.15: U1.B8@73.9,51 v2(74.3,50.6)
  Bottom Layer w0.15: X2.109@65.2,29.2 65.2,30 66.6,31.4 75.9,31.4 78.842,34.342 78.842,35.916 78.632,36.125 76.803,36.125 76.657,36.271 76.657,41.529 75.9,42.286 75.9,49 v2(74.3,50.6)
UART2: U1.C9 X2.107 | length 35.5
  Top Layer w0.15: v1(74.4,49.9) U1.C9@74.7,50.2
  MidLayer2 w0.15: 64,29.4 64.2,29.6 73.555,29.6 79.5,35.545 79.5,41.201 79.329,41.372 79.329,41.855 78.689,42.494 78.689,43.211 77.1,44.8 77.1,46 76.9,46.2 76.4,46.2 75.5,47.1 75.5,49.3 75.4,49.4 74.9,49.4 v1(74.4,49.9)
UART3: U1.E9 X2.106 | length 33.3
  Top Layer w0.15: U1.E9@74.7,48.6 v1(75.1,48.2)
  MidLayer2 w0.15: 63.4,29.5 63.8,29.9 73.467,29.9 79.225,35.658 79.225,40.993 79.045,41.173 79.045,41.732 78.41,42.367 78.41,42.99 76.8,44.6 76.6,44.6 76.3,44.9 76.3,45.5 75.1,46.7 v1(75.1,48.2)
UART4: U1.C7 X2.105 | length 30.4
  Top Layer w0.15: U1.C7@73.1,50.2 v2(73.5,49.8)
  Bottom Layer w0.15: X2.105@62.8,29.2 62.8,30.2 63.55,30.95 ; 63.6,31 64.825,32.225 71.525,32.225 72.925,33.625 72.925,40.475 72.475,40.925 72.475,47.775 73,48.3 73.5,48.3 73.9,48.7 73.9,49.4 v2(73.5,49.8)
UART5: U1.D8 X2.104 | length 28.9
  Top Layer w0.15: v2(73.5,49) U1.D8@73.9,49.4
  Bottom Layer w0.15: X2.104@62.2,29.2 62.2,30.1 64.6,32.5 70.1,32.5 72.4,34.8 72.65,35.05 72.65,39.939 72.2,40.389 72.2,48.2 73,49 v2(73.5,49)
UART6: U1.E7
UART7: U1.F7
UART_OUT0: U4.13 X2.110 | length 20.5
  Bottom Layer w0.15: X2.110@65.8,29.2 65.8,30 66.9,31.1 76,31.1 79.172,34.272 79.172,36.728 78.475,37.425 U4.13@77.325,37.425
UART_OUT1: U4.8 X2.111 | length 19.4
  Bottom Layer w0.15: X2.111@66.4,29.2 66.4,30.2 67,30.8 76.4,30.8 80.425,34.825 U4.8@82.875,34.825
USB0: U1.B4 U5.2 | length 18.8
  Top Layer w0.15: v2(70.3,50.6) U1.B4@70.7,51 ; v2(70.358,38.735) 69.8,38.177 69.8,36.6 v2(70.6,35.8)
  Bottom Layer w0.15: U5.2@69.125,35.475 70.275,35.475 v2(70.6,35.8) ; v2(70.3,50.6) 70.3,49.567 70.5,49.367 70.5,48.6 69.025,47.125 69.025,41.175 70.3,39.9 70.3,38.793 v2(70.358,38.735)
USB1: U1.B6 U5.14 | length 18.5
  Top Layer w0.15: U1.B6@72.3,51 v2(72.7,50.6)
  Bottom Layer w0.15: v2(72.7,50.6) 73.8,50.6 75.6,48.8 75.6,42.005 76.276,41.329 76.276,36.576 75.825,36.125 U5.14@74.675,36.125
USB2: U1.C6 U5.13 | length 18.5
  Top Layer w0.15: v2(71.9,49.8) U1.C6@72.3,50.2
  Bottom Layer w0.15: v2(71.9,49.8) 72,49.8 72.4,50.2 73.811,50.2 75.325,48.686 75.325,42.088 73.533,40.296 73.533,36.855 73.613,36.775 U5.13@74.675,36.775
USB3: U1.A6 U5.5 | length 17.9
  Top Layer w0.15: v2(71.9,51.4) U1.A6@72.3,51.8
  Bottom Layer w0.15: U5.5@69.125,37.425 70.425,37.425 71.2,38.2 71.2,39.7 69.9,41 69.9,47.5 70.8,48.4 70.8,49.456 70.7,49.556 70.7,50.7 71,51 71.5,51 v2(71.9,51.4)
USB4: U1.D6 U5.6 | length 15.6
  Top Layer w0.15: v2(70.8,38.8) 71.5,38.8 71.693,38.607 71.946,38.354 v2@72.263,37.973 ; v2(71.9,49) U1.D6@72.3,49.4
  Bottom Layer w0.15: U5.6@69.125,38.075 70.375,38.075 70.8,38.5 v2(70.8,38.8) ; v2(71.9,49) 71.9,40.2 72.2,39.9 v2@72.2,38.1
  other v2: 72.288,37.998
USB5: U1.A5 U5.7 | length 16.2
  Top Layer w0.15: v2(71.1,51.4) U1.A5@71.5,51.8
  Bottom Layer w0.15: U5.7@69.125,38.725 69.1,38.7 68.2,38.7 68,38.9 68,39.9 68.75,40.65 68.75,47.25 70.2,48.7 70.2,49.278 69.9,49.578 69.9,50.9 70,51 70.4,51 70.8,51.4 v2(71.1,51.4)
USB6: U1.B5 U5.4 | length 17
  Top Layer w0.15: v2(71.1,50.6) U1.B5@71.5,51
  Bottom Layer w0.15: U5.4@69.125,36.775 70.375,36.775 71.5,37.9 71.5,39.8 70.175,41.125 70.175,47.34 71.1,48.265 v2(71.1,50.6)
USB7: U1.A4 U5.3 | length 18.6
  Top Layer w0.15: v2(70.3,51.4) U1.A4@70.7,51.8
  Bottom Layer w0.15: U5.3@69.125,36.125 68.175,36.125 68.1,36.2 68.1,38.4 67.6,38.9 67.6,40 68.475,40.875 68.475,47.475 69.9,48.9 69.9,49.189 69.6,49.489 69.6,51.1 69.9,51.4 v2(70.3,51.4)
USB_OUT0: R21.1 R22.2 X2.101 | length 22.1
  Top Layer w0.15: v2(62.23,27.991) 63.381,27.991 68.973,33.583 71.59,33.583 73.005,34.998 75.098,34.998 R22.2@75.9,35.8 75.352,36.347 74.452,36.347 R21.1@74,36.8
  Bottom Layer w0.15: X2.101@60.4,29.2 60.4,28.322 60.604,28.118 62.027,28.118 62.154,27.991 v2(62.23,27.991)
USB_OUT1: R23.2 X2.100 | length 19.8
  Top Layer w0.15: v2(61.824,27.711) 61.824,28.194 62.027,28.397 63.398,28.397 68.859,33.858 71.476,33.858 72.891,35.273 74.373,35.273 R23.2@74.9,35.8
  Bottom Layer w0.15: X2.100@59.8,29.2 59.8,28.363 60.452,27.711 v2(61.824,27.711)
pads on no net: Q1.0 R28.2 U1.K14 U1.L14 U2.14 U2.30 U2.57 U2.69 U2.70 U2.73 U3.32 U4.10 U6.1 U11.4 U11.24 U11.37 U11.38 U11.39 U11.40 U11.41 U11.43 U11.44 U11.45 U11.46 U11.47 U11.49 U11.50 U11.51 U11.52 U11.53 U11.54 U11.56 U11.57 U11.59 U11.61 U11.68 U11.69 U11.70 U11.71 U11.74 U11.75 U11.77 U11.78 U11.91 U12.6 U12.7 U13.37 U13.38 U13.39 U13.57 U13.69 U13.70 U13.109 U13.110 U13.111 U13.144 X1.0 X1.47 X1.58 X1.59 X1.60 X1.69 X1.73 X1.108 X2.0 X2.22 X2.27 X2.36 X2.37 X2.84 X2.85 X2.94 X2.102 X2.103 X2.118

## Keep-outs
Keep-Out Layer:
  lines w0.15: 14.5,21.5 14.5,60.5 85.5,60.5 85.5,21.5 14.5,21.5

## Other copper
Top Layer:
  text "1" at 15.108,58.46 h1.52
MidLayer1:
  text "2" at 15.908,58.46 h1.52
MidLayer2:
  text "3" at 17.208,58.46 h1.52
MidLayer3:
  text "4" at 18.508,58.46 h1.52
MidLayer4:
  text "5" at 19.808,58.36 h1.52
Bottom Layer:
  text "6" at 21.108,58.36 h1.52

## Silkscreen, mask and mechanical layers (free items; w line width, h text height)
Mechanical 1:
  lines w0.254: 43.4,1.9 43.4,11.7 99,11.7 ; 74.8,1.8 74.8,11.7 ; 74.8,6.6 99,6.6 ; 85.3,1.7 85.3,11.7 ; 99,65.1 99.3,65.4 2.9,65.4 2.9,1.7 99,1.7 99,65.4
  text "COMPANY CONFIDENTIAL" at 76.4,13 h1.02
  text "Drawn:" at 45.5,8.7 h1.02
  text "NC" at 56.9,8.7 h1.02
  text "Issue" at 77.3,8.6 h1.27
  text "0A" at 90.9,8.5 h1.52
  text "Accepted:" at 45.5,6.1 h1.02
  text "Date" at 77.4,3.7 h1.27
  text "30.08.2005" at 87.5,3.7 h1.02
  text "Comment:" at 45.5,3.4 h1.02
  text "Property of the Armadeus Project" at 4.7,2.7 h1.02

## Dimensions
85.572,18 to 14.572,18.4 on Mechanical 1
91.1,22.506 to 90.6,60.506 on Mechanical 1